# EAGLE board GrooveCard (EAGLE 8.3.1)
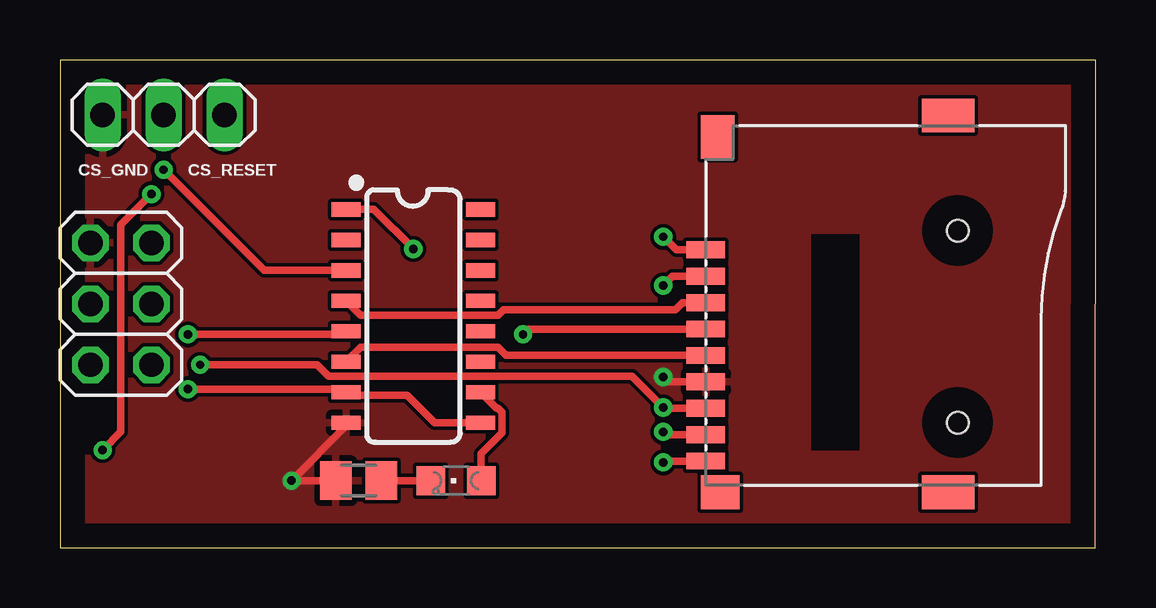
[diagram p0: board, top side]
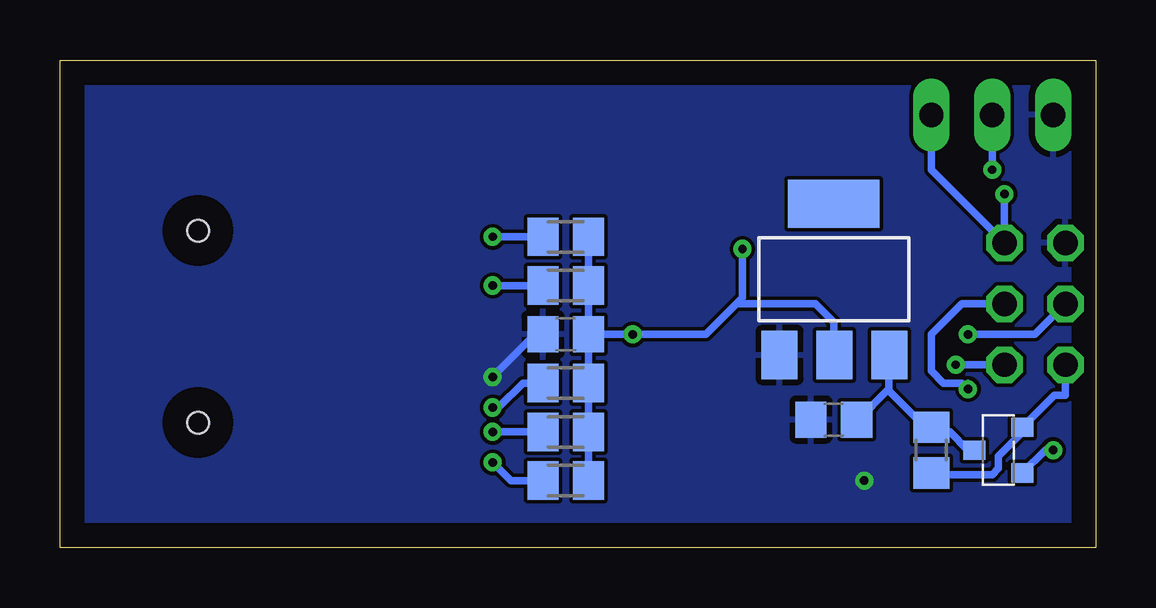
[diagram p1: board, bottom side, seen from below]

Size 43.18 x 20.32 mm. Coordinates in mm from the lower left corner, seen from the top.
Outline: 0,0 43.16,0 43.18,20.32 0,20.32 0,0
Copper layers (1*16): Top 0.035mm / dielectric 1.5mm / Bottom 0.035mm
Design rules "default": minimum track width 6mil, minimum drill 0.35mm, track to track 6mil, track to pad 6mil, pad to pad 6mil, via to via 6mil, smd to smd 6mil, copper to edge 40mil, drill to drill 6mil, minimum pad ring 10mil, minimum via ring 8mil, stop-mask expansion 4mil, vias tented up to drill 0mil, thermal gap 10mil

## Footprints (pad centres in the part's own frame; a part is rotated, then mirrored left to right if it is on the bottom)
C0805 = smd 1.3 x 1.5: 1 -0.95,0; 2 0.95,0
SOT223 = smd 1.499 x 2.007: 1 -2.261,-3.15; 2 0.025,-3.15; 3 2.311,-3.15 | smd 3.81 x 2.007: 4 0,3.15
MICRO-SD9+4P-SMD-16.1X14.5X1.85MM = smd 1.6 x 0.7: 1 0,2.25; 2 0,1.15; 3 0,0.05; 4 0,-1.05; 5 0,-2.15; 6 0,-3.25; 7 0,-4.35; 8 0,-5.45; 9 0,-6.55 | smd 1.6 x 1.4: G1 0.6,-7.85 | smd 2.2 x 1.4: G2 10.1,-7.85; G3 10.1,7.85 | smd 1.4 x 1.8: G4 0.5,6.95 | hole 0.9: 10.5,-4.95; 10.5,3.05
2X03 = drill 1.016 octagon: 1 -2.54,-1.27; 2 -2.54,1.27; 3 0,-1.27; 4 0,1.27; 5 2.54,-1.27; 6 2.54,1.27
1X03 = drill 1.016 long: 1 -2.54,0; 2 0,0; 3 2.54,0
CHIPLED_0805 = smd 1.2 x 1.2: A 0,-1.05; C 0,1.05
MICRO3 = smd 0.8 x 0.9: 1 -0.95,-1; 2 0.95,-1; 3 0,1
M0805 = smd 1.3 x 1.6: 1 -0.95,0; 2 0.95,0
R0805 = smd 1.3 x 1.5: 1 -0.95,0; 2 0.95,0
SO16 = smd 0.6 x 1.2: 1 -4.445,-2.8; 2 -3.175,-2.8; 3 -1.905,-2.8; 4 -0.635,-2.8; 5 0.635,-2.8; 6 1.905,-2.8; 7 3.175,-2.8; 8 4.445,-2.8; 9 4.445,2.8; 10 3.175,2.8; 11 1.905,2.8; 12 0.635,2.8; 13 -0.635,2.8; 14 -1.905,2.8; 15 -3.175,2.8; 16 -4.445,2.8

## Placement (x,y rotation side)
C1  [C0805]  10.92,5.33 180 bottom
C2  [C0805]  22.1,8.89 180 bottom
IC2  REG1117  [SOT223]  10.92,11.18 0 bottom
J1  MICROSD-9P  [MICRO-SD9+4P-SMD-16.1X14.5X1.85MM]  26.92,10.16 0 top
JP1  [2X03]  2.54,10.16 90 top
JP2  [1X03]  4.32,18.03 0 top
L_ACT  [CHIPLED_0805]  16.51,2.79 90 top
Q1  IRLML5203  [MICRO3]  4.06,4.06 90 bottom
R1  [M0805]  22.1,6.86 0 bottom
R2  [M0805]  22.1,10.92 0 bottom
R3  [M0805]  22.1,12.95 0 bottom
R4  [M0805]  22.1,4.83 0 bottom
R5  [M0805]  22.1,2.79 0 bottom
R6  1k  [M0805]  12.45,2.79 180 top
R7  [R0805]  6.86,4.06 270 bottom
U1  74HC4050  [SO16]  14.73,9.65 270 top

## Library data of the parts
C1 C2 R1-R7 = resistor
IC2 = burr-brown; MPN: REG1117; OC_FARNELL: 1097566; OC_NEWARK: 14P6981
J1 = Seeed-Connector
JP1 JP2 = pinhead
L_ACT = led
Q1 = transistor-power
U1 = SparkFun-IC-Comms; PROD_ID: IC-09604

## Nets
5V_CS: JP2.2 U1.3
5V_DI: JP1.4 U1.5
5V_SCLK: JP1.3 U1.7 U1.9
+3V3: C2.1 IC2.2 J1.4 R1.2 R2.2 R3.2 R4.2 R5.2 U1.1
+5V: JP1.2 Q1.2 R7.2
CS: J1.2 R2.1
DI: J1.3 U1.4
DO: J1.7 JP1.1 R1.1
GND: C1.2 C2.2 IC2.1 J1.6 JP1.6 JP2.1 R6.2 U1.8
N$1: L_ACT.A U1.10
N$3: J1.8 R4.1
N$4: J1.1 R3.1
N$5: J1.9 R5.1
N$6: L_ACT.C R6.1
N$7: C1.1 IC2.3 Q1.3 R7.1
N$8: U1.2
RESET: JP1.5 JP2.3 Q1.1
SCLK: J1.5 U1.6

## Tracks (layer width: path | path; a pad name or v marks a point on that pad's centre or on a via)
5V_CS  (via drill 0.35)
  Top 0.305: U1.3 8.51,11.56 v4.32,15.75
  Bottom 0.305: JP2.2 v4.32,15.75
5V_DI  (via drill 0.35)
  Top 0.305: v5.33,8.89 11.8,8.89 U1.5
  Bottom 0.305: JP1.4 2.54,8.89 v5.33,8.89
5V_SCLK  (via drill 0.35)
  Top 0.305: U1.9 15.62,5.21 14.48,6.35 12.06,6.35 U1.7 11.8,6.6 v5.33,6.6
  Bottom 0.305: 5.33,6.86 v5.33,6.6 5.59,6.86 6.35,6.86 6.86,7.37 6.86,8.89 5.59,10.16 JP1.3
+3V3  (via drill 0.35)
  Top 0.305: J1.4 19.52,9.11 v19.3,8.89 | U1.1 13.08,14.1 v14.73,12.45
  Bottom 0.305: C2.1 v19.3,8.89 16.26,8.89 15.1,10.04 | C2.1 R1.2 R4.2 R5.2 | C2.1 R2.2 R3.2 | 15.1,10.04 14.99,10.16 11.68,10.16 10.92,9.4 10.92,8.05 IC2.2 | v14.73,12.45 14.73,10.41 15.1,10.04
+5V
  Bottom 0.305: JP1.2 1.27,6.35 1.73,6.35 Q1.2 3.06,4.81 4.06,3.81 4.06,3.3 4.32,3.05 6.79,3.05 R7.2
CS  (via drill 0.35)
  Top 0.305: J1.2 25.53,11.31 v25.15,10.92
  Bottom 0.305: R2.1 v25.15,10.92
DI
  Top 0.305: J1.3 25.96,10.21 25.65,9.91 18.48,9.91 18.26,9.68 12.54,9.68 U1.4
DO  (via drill 0.35)
  Top 0.305: 25.18,5.81 J1.7 | v25.15,5.84 25.18,5.81 | v5.84,7.62 10.73,7.62 11.21,7.14 23.85,7.14 25.18,5.81
  Bottom 0.305: v25.15,5.84 24.89,5.84 23.88,6.86 R1.1 | JP1.1 v5.84,7.62
GND  (via drill 0.35)
  Top 0.305: J1.6 25.35,6.91 v25.15,7.11 | R6.2 v9.65,2.79 11.93,5.07 U1.8
  Bottom 0.305: v25.15,7.11 23.62,8.64 23.3,8.64 C2.2
  pour Bottom: 0,20.32 43.18,20.32 43.18,0 0,0
  pour Top: 0,20.32 43.18,20.32 43.18,0 0,0
N$1
  Top 0.305: L_ACT.A 17.56,3.9 18.44,4.78 18.44,5.63 18.26,5.81 18.2,5.81 U1.10
N$3  (via drill 0.35)
  Top 0.305: J1.8 25.26,4.71 v25.15,4.83
  Bottom 0.305: v25.15,4.83 R4.1
N$4  (via drill 0.35)
  Top 0.305: J1.1 25.69,12.41 v25.15,12.95
  Bottom 0.305: v25.15,12.95 R3.1
N$5  (via drill 0.35)
  Top 0.305: J1.9 25.2,3.61 v25.15,3.56
  Bottom 0.305: v25.15,3.56 24.38,2.79 R5.1
N$6
  Top 0.305: L_ACT.C R6.1
N$7
  Bottom 0.305: C1.1 9.91,5.33 8.67,6.57 | 8.67,6.57 8.64,6.6 8.64,8 IC2.3 | Q1.3 5.33,4.06 6.1,4.83 6.67,4.83 R7.1 7.11,5.01 8.67,6.57
RESET  (via drill 0.35)
  Top 0.305: v3.81,14.73 2.54,13.46 2.54,4.83 v1.78,4.06
  Bottom 0.305: v3.81,14.73 JP1.5 6.86,15.75 JP2.3 | v1.78,4.06 2.11,4.06 Q1.1
SCLK
  Top 0.305: J1.5 18.6,8.01 18.26,8.35 12.54,8.35 U1.6

## Text on the board
tPlace: CS_GND | CS_RESET